# EAGLE board UTN-Clase-Electronica02_002-CottierSolange-C3 (EAGLE 9.7.0)

Size 130.5 x 74.21 mm. Coordinates in mm from the lower left corner, seen from the top.
Outline: 0,0 130.5,0 130.5,74.21 0,74.21 0,0
Copper layers (1*16): Top 0.035mm / dielectric 1.5mm / Bottom 0.035mm
Design rules "default": minimum track width 6mil, minimum drill 0.35mm, track to track 6mil, track to pad 6mil, pad to pad 6mil, via to via 6mil, smd to smd 6mil, copper to edge 40mil, drill to drill 6mil, minimum pad ring 10mil, minimum via ring 8mil, stop-mask expansion 4mil, vias tented up to drill 0mil, thermal gap 10mil

## Footprints (pad centres in the part's own frame; a part is rotated, then mirrored left to right if it is on the bottom)
BATTERY-GENERIC = drill 1.118 pad 3.15 octagon: + 2.54,0; - -2.54,0
LED-RGB-5MM = drill 0.9: B 0.635,0.635; C -0.635,-0.635; G 1.905,-0.635; R -1.905,0.635
RESAD1016W63L850D250B = drill 0.83 pad 1.43: 1 -5.08,0; 2 5.08,0
HA-06-SM065 = drill 1 pad 1.676: 1 -2.54,-2.54; 2 0,2.54; 3 2.54,-2.54
SWITCH-SPDT-PTH-8.5X3.7MM = drill 1.016 pad 1.88: 1 -2.54,0; 2 0,0; 3 2.54,0

## Placement (x,y rotation side)
BAT1  9V  [BATTERY-GENERIC]  122.24,37.08 270 top
D1  LED-RGBRCBG-PTH  [LED-RGB-5MM]  7.49,6.65 90 top
R1  1k  [RESAD1016W63L850D250B]  28.73,6.33 0 top
RPOT1  250k  [HA-06-SM065]  11.5,67.16 90 top
RPOT2  250k  [HA-06-SM065]  11.61,34.86 90 top
S1  TOGGLE  [SWITCH-SPDT-PTH-8.5X3.7MM]  70.26,36.44 270 top

## Library data of the parts
BAT1 D1 R1 RPOT1 RPOT2 S1 = Tinkercad

## Nets
BAT1+: BAT1.+ RPOT1.2 RPOT2.2 S1.1
BAT1-: BAT1.- S1.3
D1_B: D1.B RPOT2.1
D1_C: D1.C R1.1
D1_R: D1.R RPOT1.1
S1_P: R1.2 S1.2

## Tracks (layer width: path | path; a pad name or v marks a point on that pad's centre or on a via)
BAT1+  (3 unrouted)
BAT1-  (1 unrouted)
D1_B  (1 unrouted)
D1_C  (1 unrouted)
D1_R  (1 unrouted)
S1_P  (1 unrouted)